# EAGLE board DGN - Projeto Sensor LDR (EAGLE 9.7.0)

Size 188.65 x 118.67 mm. Coordinates in mm from the lower left corner, seen from the top.
Outline: 0,0 188.65,0 188.65,118.67 0,118.67 0,0
Copper layers (1*16): Top 0.035mm / dielectric 1.5mm / Bottom 0.035mm
Design rules "default": minimum track width 6mil, minimum drill 0.35mm, track to track 6mil, track to pad 6mil, pad to pad 6mil, via to via 6mil, smd to smd 6mil, copper to edge 40mil, drill to drill 6mil, minimum pad ring 10mil, minimum via ring 8mil, stop-mask expansion 4mil, vias tented up to drill 0mil, thermal gap 10mil

## Footprints (pad centres in the part's own frame; a part is rotated, then mirrored left to right if it is on the bottom)
LEDRD254W60D565H860B_G = drill 0.981 pad 1.581: 1 -1.27,0; 2 1.27,0
LEDRD254W60D565H860B_Y = drill 0.981 pad 1.581: 1 -1.27,0; 2 1.27,0
LEDRD254W60D565H860B = drill 0.981 pad 1.581: 1 -1.27,0; 2 1.27,0
RESAD1016W63L850D250B = drill 0.83 pad 1.43: 1 -5.08,0; 2 5.08,0
GL5528 = drill 0.8 pad 1.4: 1 -1.702,0; 2 1.702,0
HA-06-SM065 = drill 1 pad 1.676: 1 -2.54,-2.54; 2 0,2.54; 3 2.54,-2.54
ARDUINO-UNO-R3-SHIELD = drill 1.016 pad 1.88: 3.3V 24.13,-2.54; 5V 24.13,0; A0 24.13,12.7; A1 24.13,15.24; A2 24.13,17.78; A3 24.13,20.32; A4 24.13,22.86; A5 24.13,25.4; AREF -24.13,-13.97; D2 -24.13,20.32; D3 -24.13,17.78; D4 -24.13,15.24; D5 -24.13,12.7; D6 -24.13,10.16; D7 -24.13,7.62; D8 -24.13,3.81; D9 -24.13,1.27; D10 -24.13,-1.27; D11 -24.13,-3.81; D12 -24.13,-6.35; D13 -24.13,-8.89; GND@0 24.13,2.54; GND@1 24.13,5.08; GND@2 -24.13,-11.43; IOREF 24.13,-7.62; NC 24.13,-10.16; RES 24.13,-5.08; RX -24.13,25.4; SCL -24.13,-19.05; SDA -24.13,-16.51; TX -24.13,22.86; VIN 24.13,7.62
JHD-162A = drill 1.016 long: 1 -19.05,0; 2 -16.51,0; 3 -13.97,0; 4 -11.43,0; 5 -8.89,0; 6 -6.35,0; 7 -3.81,0; 8 -1.27,0; 9 1.27,0; 10 3.81,0; 11 6.35,0; 12 8.89,0; 13 11.43,0; 14 13.97,0; 15 16.51,0; 16 19.05,0

## Placement (x,y rotation side)
D1  GREEN  [LEDRD254W60D565H860B_G]  157.65,91.89 180 top
D2  YELLOW  [LEDRD254W60D565H860B_Y]  165.27,91.89 180 top
D3  RED  [LEDRD254W60D565H860B]  172.89,91.89 180 top
R1  220  [RESAD1016W63L850D250B]  151.3,99.51 270 top
R2  10k  [RESAD1016W63L850D250B]  133.52,66.49 90 top
R3  PHOTOCELL_GL5528  [GL5528]  132.25,79.19 0 top
R4  330  [RESAD1016W63L850D250B]  158.92,81.73 90 top
R6  330  [RESAD1016W63L850D250B]  166.54,81.73 90 top
R7  330  [RESAD1016W63L850D250B]  174.16,81.73 90 top
RPOT1  250k  [HA-06-SM065]  110.66,74.11 0 top
U2  ARDUINO-UNO-R3-SHIELD  [ARDUINO-UNO-R3-SHIELD]  47.88,88.83 270 top
U3  LCD-16X2JHD-162A  [JHD-162A]  133.03,36.63 0 top

## Library data of the parts
D1 = Tinkercad; CATEGORY: Opto-Electronic; SUB-CATEGORY: LED; VALUE: LED_GREEN
D2 = Tinkercad; CATEGORY: Opto-Electronic; SUB-CATEGORY: LED; VALUE: LED_YELLOW
D3 = Tinkercad; CATEGORY: Opto-Electronic; SUB-CATEGORY: LED; VALUE: LED_RED
R1-R4 R6 R7 RPOT1 U2 U3 = Tinkercad

## Nets
D1_A: D1.1 R4.2
D2_A: D2.1 R6.2
D3_A: D3.1 R7.2
U2_5V: R1.1 R3.1 RPOT1.1 U2.5V U3.2
U2_A0: R2.2 R3.2 U2.A0
U2_D2: U2.D2 U3.14
U2_D3: U2.D3 U3.13
U2_D4: U2.D4 U3.12
U2_D5: U2.D5 U3.11
U2_D6: R4.1 U2.D6
U2_D7: R6.1 U2.D7
U2_D8: R7.1 U2.D8
U2_D11: U2.D11 U3.6
U2_D12: U2.D12 U3.4
U2_GND: D1.2 D2.2 D3.2 R2.1 RPOT1.3 U2.GND@0 U2.GND@1 U2.GND@2 U3.1 U3.5 U3.16
U3_LED+: R1.2 U3.15
U3_VO: RPOT1.2 U3.3

## Tracks (layer width: path | path; a pad name or v marks a point on that pad's centre or on a via)
D1_A  (1 unrouted)
D2_A  (1 unrouted)
D3_A  (1 unrouted)
U2_5V  (4 unrouted)
U2_A0  (2 unrouted)
U2_D2  (1 unrouted)
U2_D3  (1 unrouted)
U2_D4  (1 unrouted)
U2_D5  (1 unrouted)
U2_D6  (1 unrouted)
U2_D7  (1 unrouted)
U2_D8  (1 unrouted)
U2_D11  (1 unrouted)
U2_D12  (1 unrouted)
U2_GND  (10 unrouted)
U3_LED+  (1 unrouted)
U3_VO  (1 unrouted)